# Altium PCB cw312ttmp91fw_template.PcbDoc
Units mil, origin at the board's own origin, x right, y up, seen from the top; angles counter-clockwise.
Board outline 2310.04 x 2113.83 mil, 2 copper layers (Top Layer, Bottom Layer); 17 components, 48 nets, 175 pads, 34 vias.
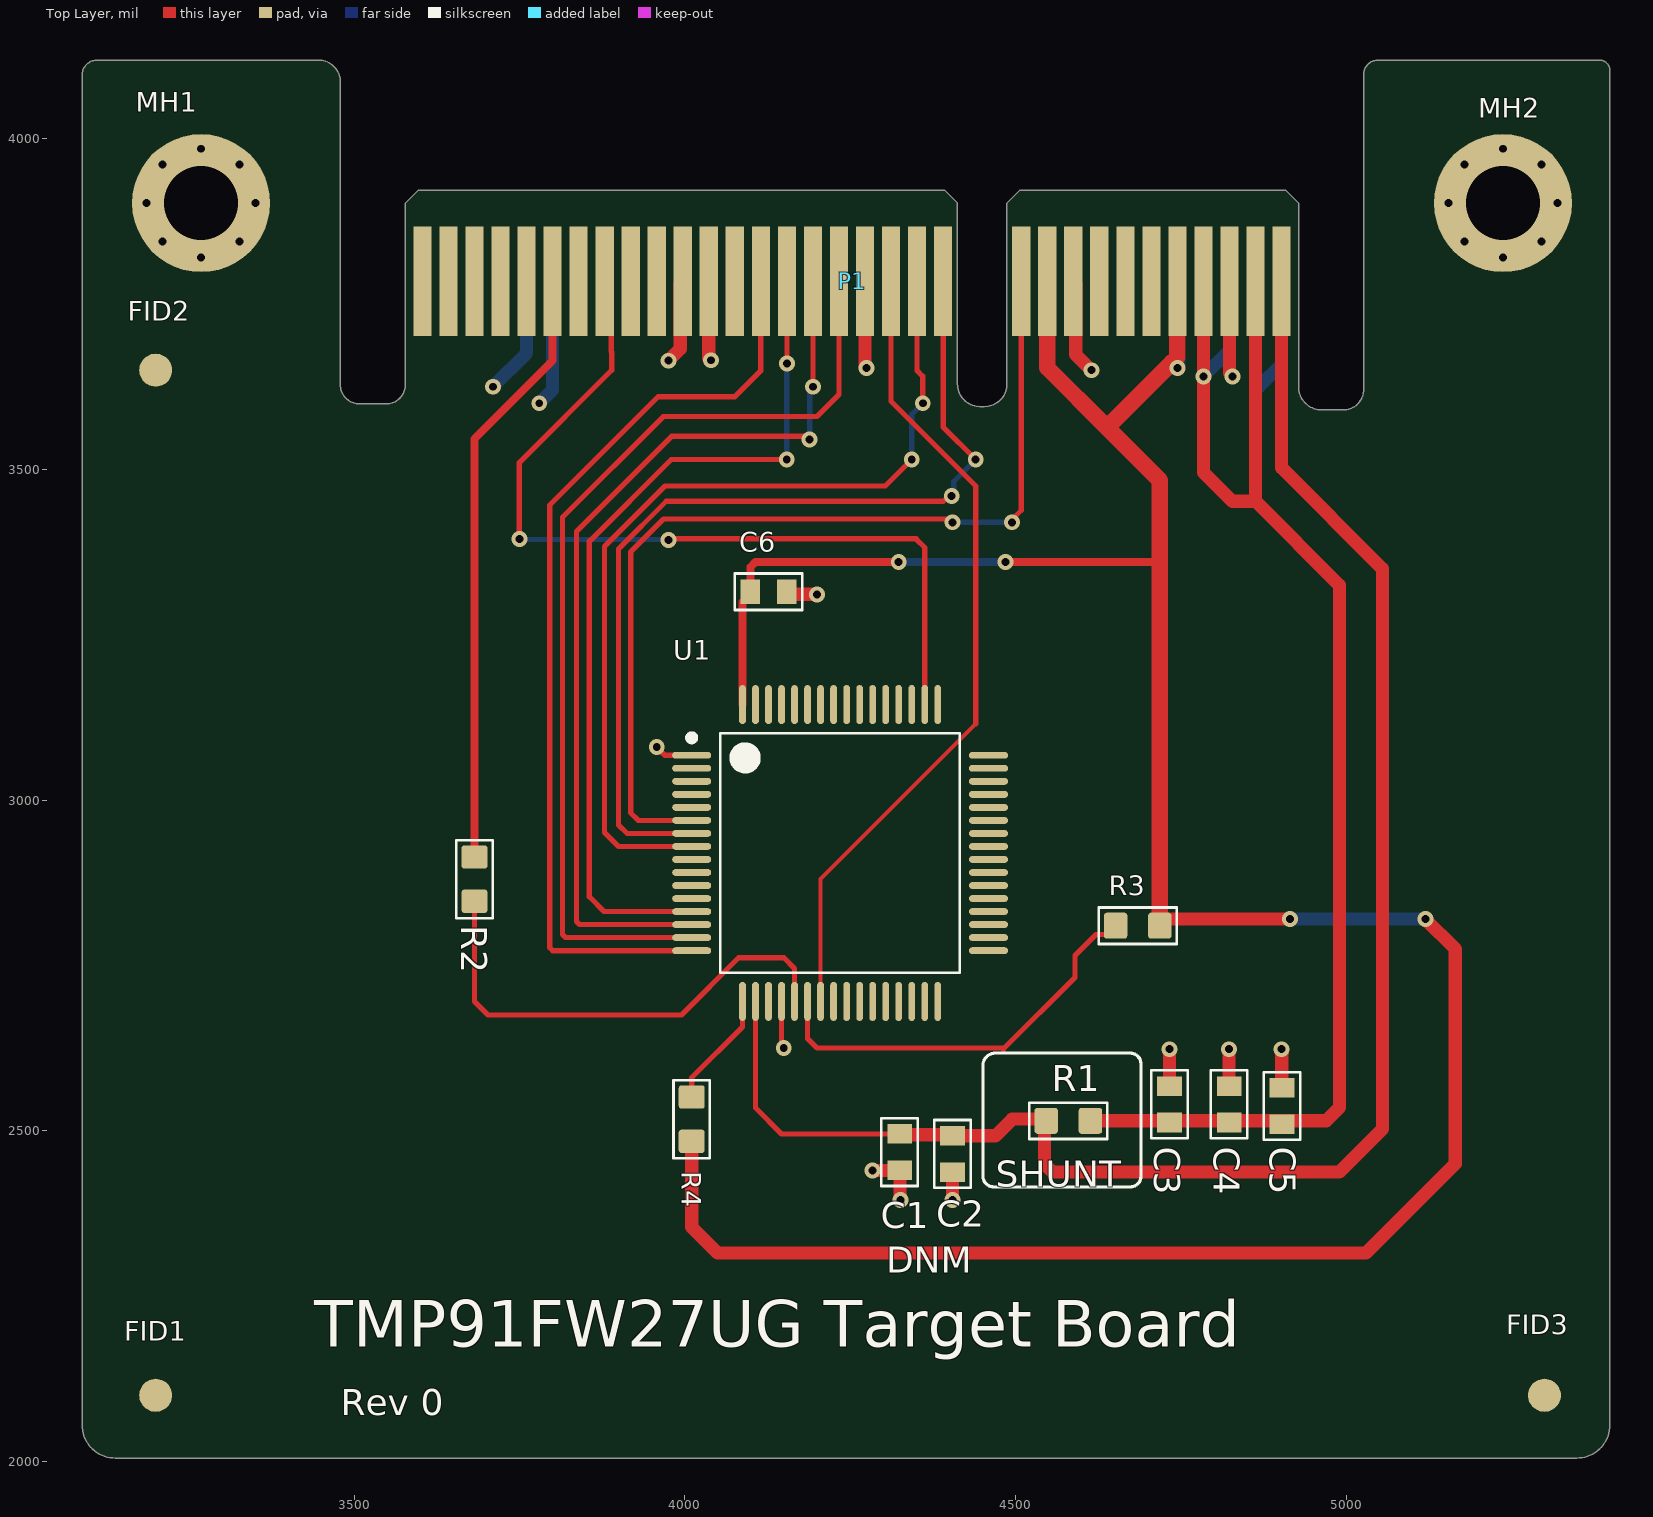
[diagram p0: Top Layer view]
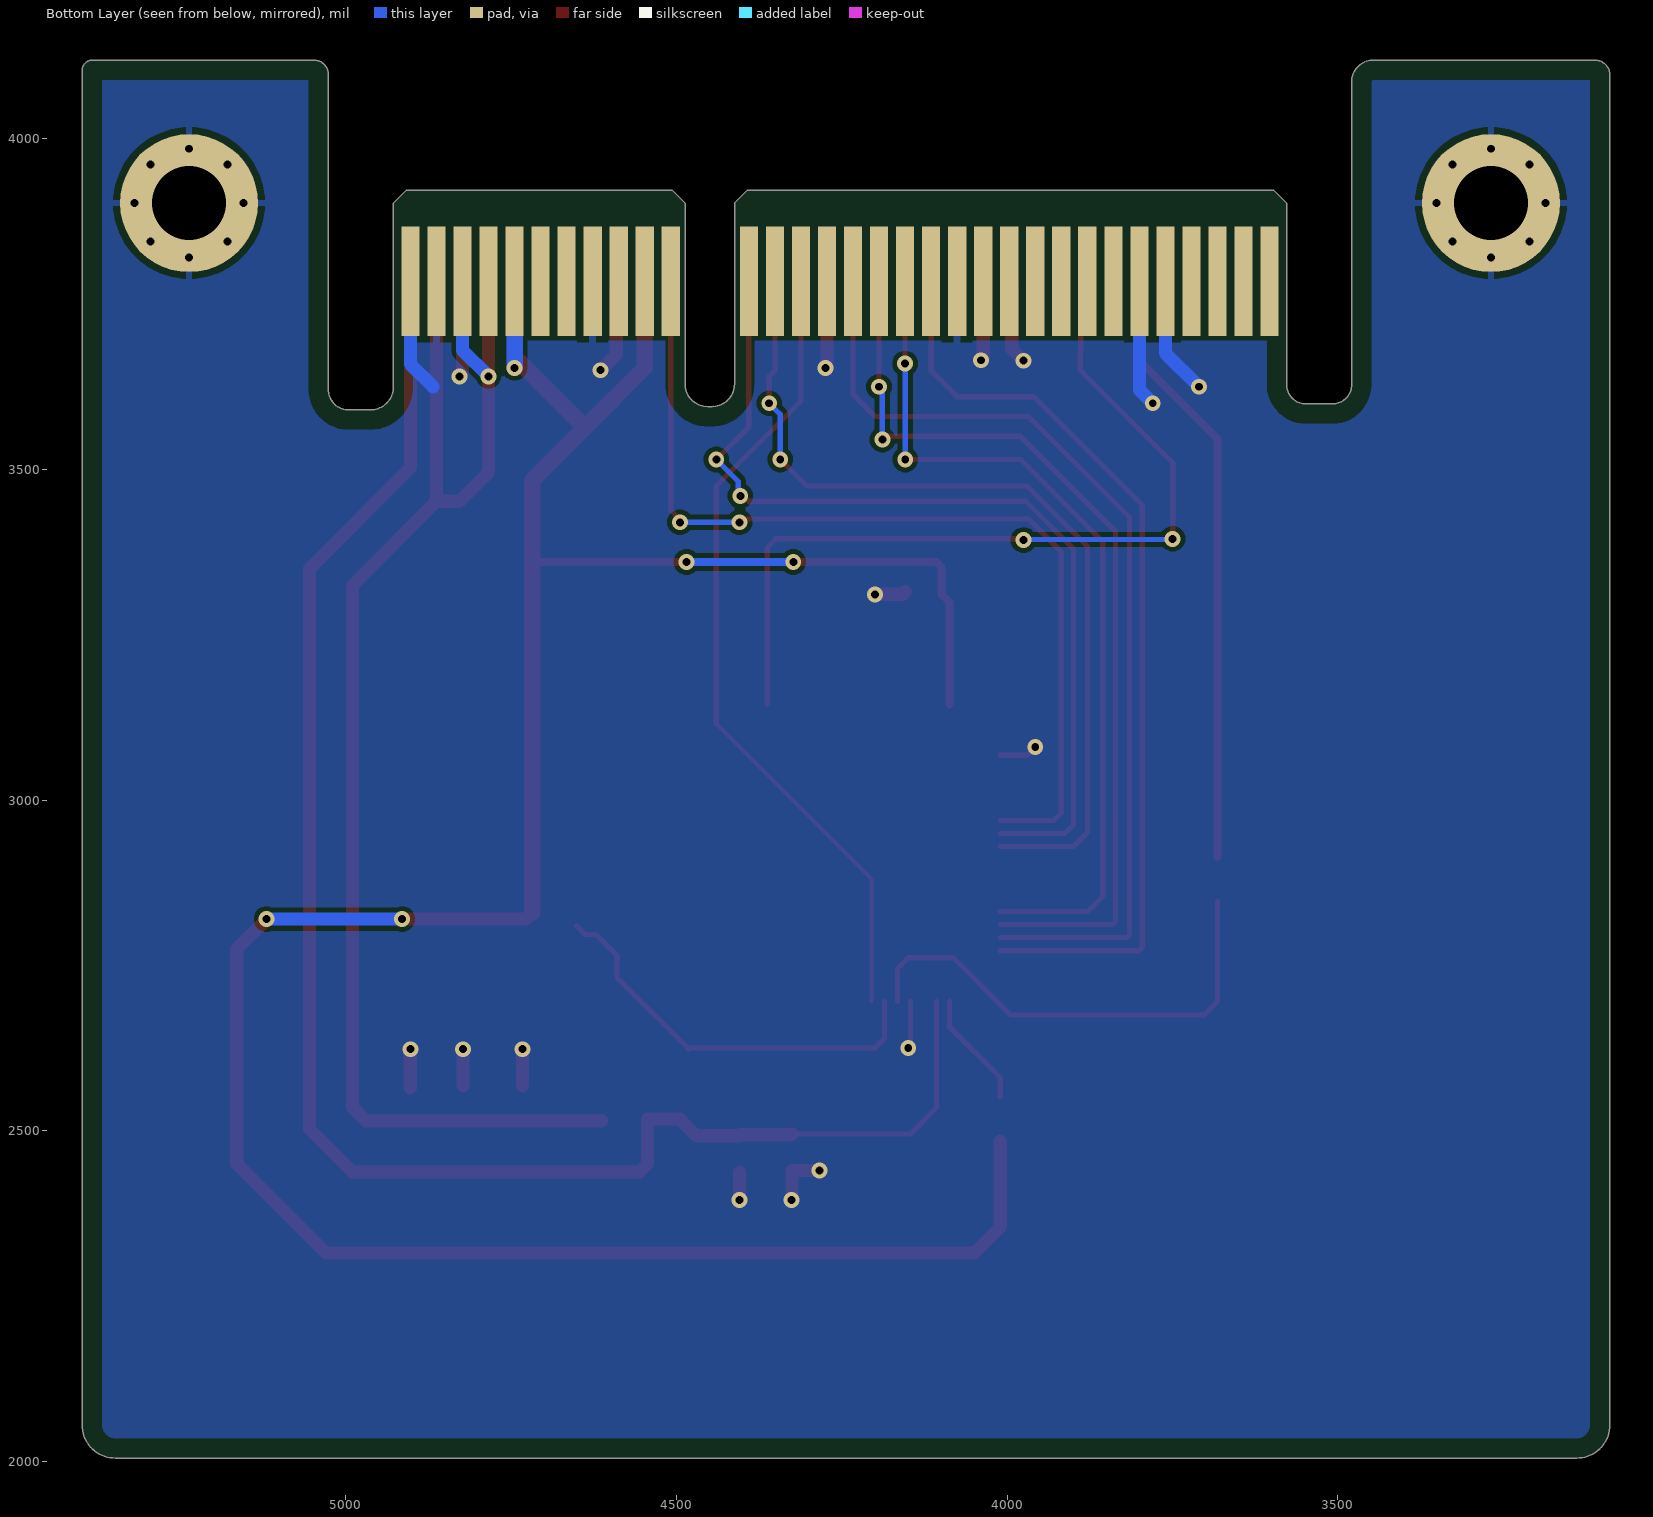
[diagram p1: Bottom Layer view, seen from below]
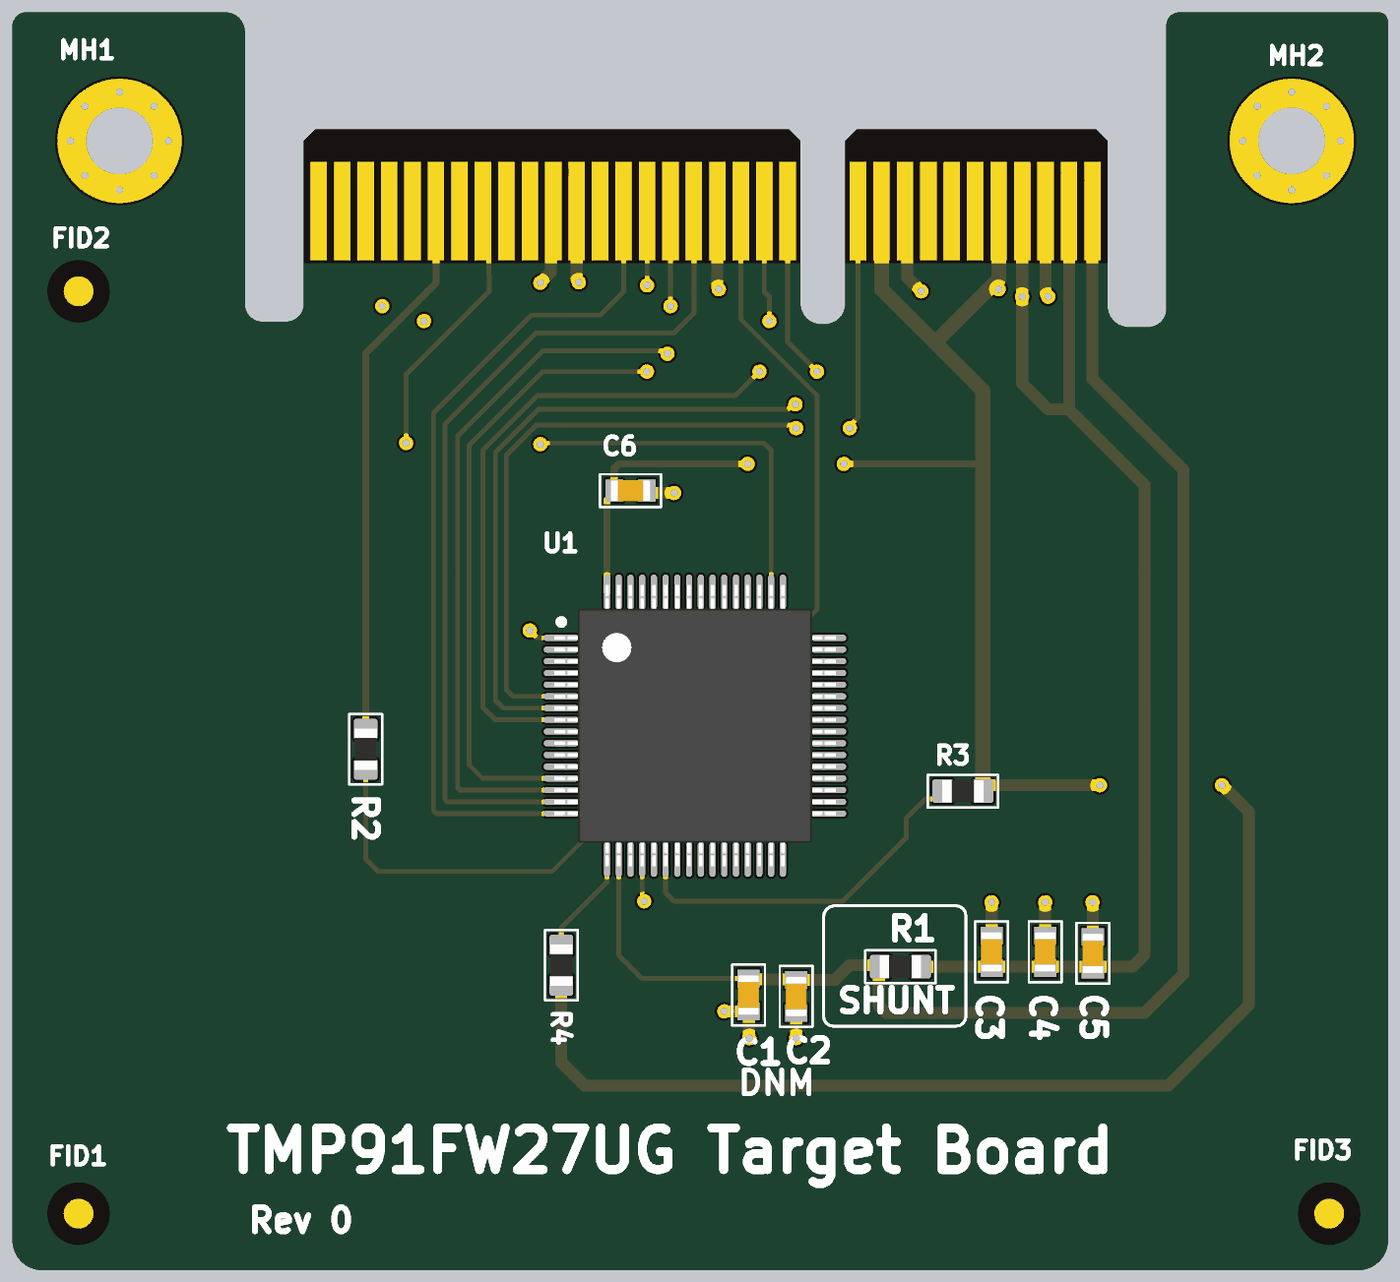
[diagram p2: 3D render of the assembled board from above, using the file's embedded part models]

## Layer stack, top to bottom
Top Solder: solder mask 0.4, Solder Resist, Dk 3.5
Top Layer: signal copper 1.4
Dielectric 1: dielectric 12.6, FR-4, Dk 4.8
Bottom Layer: signal copper 1.4
Bottom Solder: solder mask 0.4, Solder Resist, Dk 3.5

## Board outline
3088.86,2055 ccw(c3138.86,2055) 3138.86,2005 5348.9,2005 ccw(c5348.9,2055) 5398.9,2055 5398.9,4103.09 ccw(c5383.15,4103.09) 5383.15,4118.83 5048.5,4118.83 ccw(c5048.5,4096.91) 5026.58,4096.91 5026.58,3620.53 cw(c4996.05,3620.53) 4996.05,3590 4963.17,3590 cw(c4963.17,3625.02) 4928.15,3625.02 4928.15,3902.65 4908.46,3922.34 4506.89,3922.34 4487.2,3902.65 4487.2,3629.03 cw(c4453.17,3629.03) 4453.17,3595 4446.43,3595 cw(c4446.43,3629.03) 4412.4,3629.03 4412.4,3902.65 4392.72,3922.34 3597.44,3922.34 3577.76,3902.65 3577.76,3628.4 cw(c3548.35,3628.4) 3548.35,3599 3508.41,3599 cw(c3508.41,3628.08) 3479.33,3628.08 3479.33,4085.65 ccw(c3446.14,4085.65) 3446.14,4118.83 3111.5,4118.83 ccw(c3111.5,4096.2) 3088.86,4096.2

## Design rules (kind name [scope] priority, off if disabled: settings)
BoardOutlineClearance Silk_to_Outline [(OnLayer('Top Overlay'))] p1: gap=0 ignorepadtopadclearanceinfootprint=FALSE
BoardOutlineClearance [All] p2: gap=30 ignorepadtopadclearanceinfootprint=FALSE except(5: Track-OutlineEdge Track-CavityEdge Track-CutoutEdge Track-SplitBarrior Track-SplitContinuation SMDPad-OutlineEdge SMDPad-CavityEdge SMDPad-CutoutEdge SMDPad-SplitBarrior SMDPad-SplitContinuation)
Clearance [All] p1: gap=7 ignorepadtopadclearanceinfootprint=FALSE
HoleSize [All] p1: absolutevalues=TRUE maxlimit=200 minlimit=1 maxpercent=80.000 minpercent=20.000
MinimumSolderMaskSliver [All] p1: minsoldermaskwidth=5
PlaneConnect PlaneConnect_viaDirect [IsVia] p1: planeconnectstyle=Direct reliefexpansion=20 reliefentries=4 reliefconductorwidth=10 reliefairgap=10
PlaneConnect [All] p2: planeconnectstyle=Relief reliefexpansion=20 reliefentries=4 reliefconductorwidth=10 reliefairgap=10
PolygonConnect PolygonConnect_viaDirect [All vs isVia] p1: connectstyle=Direct reliefconductorwidth=10 reliefentries=4 polygonreliefangle="90 Angle" airgapwidth=10
PolygonConnect [All] p2: connectstyle=Relief reliefconductorwidth=10 reliefentries=4 polygonreliefangle="90 Angle" airgapwidth=10
RoutingVias [All] p1: holewidth=12 width=24 viastyle="Through Hole" minholewidth=12 minwidth=24 maxholewidth=100 maxwidth=200
SilkToSilkClearance [All] p1: silktosilkclearance=5
SilkToSolderMaskClearance [IsPad] p1: minsilkscreentomaskgap=5 clearancetoexposedcopper=TRUE
SolderMaskExpansion [All] p1: expansion=4 istentingtop=FALSE
Width [All] p1: maxlimit=100 minlimit=6 preferedwidth=8 minimp=50.000000 maximp=50.000000 favimp=50.000000
25 further rules are at their usual default settings.

## Classes and differential pairs
component class cw312ttmp91fw_cardedge: MH1 MH2 P1
component class cw312ttmp91fw_microcontroller: C1 C2 C3 C4 C5 C6 C? FID1 FID2 FID3 R1 R2 R3 R4 R? U1

## Components (designator, comment, footprint, x,y, rotation, side; value= is the part's Value field where it differs from the comment)
C1 "DNM" CAPC0603_M 4325,2467.56 r270 top value=100n
C2 "DNM" CAPC0603_M 4405,2465 r270 top value=100n
C3 "100n" CAPC0603_M 4733.19,2540 r90 top
C4 "100n" CAPC0603_M 4823.19,2540 r90 top
C5 "2u2" CAPC0603_M 4903.19,2537.44 r90 top
C6 "100n" CAPC0603_M 4126.73,3315 r0 top
FID1 "FIDU-ROUND-1.0MM" FIDU-ROUND-1.0mm#1 3195,2100 r0 top
FID2 "FIDU-ROUND-1.0MM" FIDU-ROUND-1.0mm#2 3210.57,3663.35 r0 top
FID3 "FIDU-ROUND-1.0MM" FIDU-ROUND-1.0mm#3 5285,2110 r0 top
MH1 "4-40 MH, Tight Fit" MOUNT_#4_TIGHT 3268.7,3902.65 r0 top
MH2 "4-40 MH, Tight Fit" MOUNT_#4_TIGHT 5237.2,3902.65 r0 top
P1 "PCIeX4-GF-2D-1000-1K-O64" PCIeX4-GF-2D-1000-1K-O64 4528.54,3784.54 r180 top
R1 "10R" RESC1608X55N 4580,2515 r0 top
R2 "10R" RESC1608X55N 3682.09,2880.47 r270 top
R3 "1k" RESC1608X55N 4685,2810 r0 top
R4 "1k" RESC1608X55N 4010.59,2517.56 r270 top
U1 "TMP91FW27UG" TQFP50P1200X1200X120-64N 4235,2920 r0 top

## Footprints (in the part's own frame and the unit in brackets; to place one, negate y for a bottom-side part, rotate by r counter-clockwise, add the part's x,y. Pads: shape width x height; smd on the part's side, far side on the other; paste and mask are expansions set on the pad)
CAPC0603_M [mm]
  rect 0.75x0.95 smd: 1(-0.7,0) 2(0.7,0)
  silkscreen extent -1.3,-0.7 1.3,0.7, body extent -0.85,-0.45 0.85,0.45, height 0.9
FIDU-ROUND-1.0mm#1 [mil]
  round 50 smd paste-78.74 mask+27.56: M1(5,0)
FIDU-ROUND-1.0mm#2 [mil]
  round 50 smd paste-78.74 mask+27.56: M1(-10.57,-13.35)
FIDU-ROUND-1.0mm#3 [mil]
  round 50 smd paste-78.74 mask+27.56: M1(15,-10)
MOUNT_#4_TIGHT [mil]
  round 14 hole 12: 1(-82.21,0) 1(-58.13,-58.13) 1(-58.13,58.13) 1(0,-82.21) 1(0,82.21) 1(0,82.21) 1(58.13,-58.13) 1(58.13,58.13) 1(82.21,0)
  round 208.66 hole 112.2: 1(0,0)
PCIeX4-GF-2D-1000-1K-O64 [mm] "Golden finger, PCIeX4, Dual, Opposite, Pitch 1mm, 64-Position"
  rect 0.7x4.2 smd far side paste-1: A1(-9.5,0) A2(-8.5,0) A3(-7.5,0) A4(-6.5,0) A5(-5.5,0) A6(-4.5,0) A7(-3.5,0) A8(-2.5,0) A9(-1.5,0) A10(-0.5,0) A11(0.5,0) A12(3.5,0) A13(4.5,0) A14(5.5,0) A15(6.5,0) A16(7.5,0) A17(8.5,0) A18(9.5,0) A19(10.5,0) A20(11.5,0) A21(12.5,0) A22(13.5,0) A23(14.5,0) A24(15.5,0) A25(16.5,0) A26(17.5,0) A27(18.5,0) A28(19.5,0) A29(20.5,0) A30(21.5,0) A31(22.5,0) A32(23.5,0)
  rect 0.7x4.2 smd paste-1: B1(-9.5,0) B2(-8.5,0) B3(-7.5,0) B4(-6.5,0) B5(-5.5,0) B6(-4.5,0) B7(-3.5,0) B8(-2.5,0) B9(-1.5,0) B10(-0.5,0) B11(0.5,0) B12(3.5,0) B13(4.5,0) B14(5.5,0) B15(6.5,0) B16(7.5,0) B17(8.5,0) B18(9.5,0) B19(10.5,0) B20(11.5,0) B21(12.5,0) B22(13.5,0) B23(14.5,0) B24(15.5,0) B25(16.5,0) B26(17.5,0) B27(18.5,0) B28(19.5,0) B29(20.5,0) B30(21.5,0) B31(22.5,0) B32(23.5,0)
RESC1608X55N [mm] "Chip Resistor, Body 1.6x0.8mm, EIA 0603, IPC Medium Density"
  round 0.254 on Mech15: 0(0,0)
  rrect25% 0.9x1 smd: 1(-0.85,0) 2(0.85,0)
  Top Layer pour cut-out: -0.6,0.5 0.6,0.5 0.6,-0.5 -0.6,-0.5
  silkscreen extent -1.5,-0.7 1.5,0.7, body extent -0.87,-0.47 0.88,0.48, height 0.54
TQFP50P1200X1200X120-64N [mm] "TQFP, 64-Leads, Body 10.00x10.00mm, Pitch 0.50mm, IPC Medium Density"
  oval 1.5x0.26 smd: 1(-5.7,3.75) 2(-5.7,3.25) 3(-5.7,2.75) 4(-5.7,2.25) 5(-5.7,1.75) 6(-5.7,1.25) 7(-5.7,0.75) 8(-5.7,0.25) 9(-5.7,-0.25) 10(-5.7,-0.75) 11(-5.7,-1.25) 12(-5.7,-1.75) 13(-5.7,-2.25) 14(-5.7,-2.75) 15(-5.7,-3.25) 16(-5.7,-3.75) 33(5.7,-3.75) 34(5.7,-3.25) 35(5.7,-2.75) 36(5.7,-2.25) 37(5.7,-1.75) 38(5.7,-1.25) 39(5.7,-0.75) 40(5.7,-0.25) 41(5.7,0.25) 42(5.7,0.75) 43(5.7,1.25) 44(5.7,1.75) 45(5.7,2.25) 46(5.7,2.75) 47(5.7,3.25) 48(5.7,3.75)
  oval 0.26x1.5 smd: 17(-3.75,-5.7) 18(-3.25,-5.7) 19(-2.75,-5.7) 20(-2.25,-5.7) 21(-1.75,-5.7) 22(-1.25,-5.7) 23(-0.75,-5.7) 24(-0.25,-5.7) 25(0.25,-5.7) 26(0.75,-5.7) 27(1.25,-5.7) 28(1.75,-5.7) 29(2.25,-5.7) 30(2.75,-5.7) 31(3.25,-5.7) 32(3.75,-5.7) 49(3.75,5.7) 50(3.25,5.7) 51(2.75,5.7) 52(2.25,5.7) 53(1.75,5.7) 54(1.25,5.7) 55(0.75,5.7) 56(0.25,5.7) 57(-0.25,5.7) 58(-0.75,5.7) 59(-1.25,5.7) 60(-1.75,5.7) 61(-2.25,5.7) 62(-2.75,5.7) 63(-3.25,5.7) 64(-3.75,5.7)
  silkscreen extent -5.82,-4.6 4.6,4.6, body extent -6,-6 6,6, height 1.2

## Part data
C1 C2: library part CCHIP-100n-0603, Case-EIA=0603, Case-Metric=1608, Manufacture 1=Kemet, Manufacture Part Number 1=C0603C104K5RACTU, Rated Voltage=50VDC, Supplier Part Number 1=399-5089-2-ND, Component Group=Capacitor, Component Type=Standard, Mounting Technology=SMT, Part Number=CCHIP-100n-0603, Pin Count=2, Supplier 1=Digi-Key
C3 C4 C6: library part CCHIP-100n-0603, "100n, 0603", Case-EIA=0603, Case-Metric=1608, Manufacture 1=Kemet, Manufacture Part Number 1=C0603C104K5RACTU, Rated Voltage=50VDC, Supplier Part Number 1=399-5089-2-ND, Component Group=Capacitor, Component Type=Standard, Mounting Technology=SMT, Part Number=CCHIP-100n-0603, Pin Count=2, Supplier 1=Digi-Key
C5: library part CCHIP-2u2-0603, "2u2, 0603", Case-EIA=0603, Case-Metric=1608, Manufacture 1=Samsung, Manufacture Part Number 1=CL10B225KP8NNNC, Rated Voltage=10VDC, Supplier Part Number 1=1276-1134-2-ND, Component Group=Capacitor, Component Type=Standard, Mounting Technology=SMT, Part Number=CCHIP-2u2-0603, Pin Count=2, Supplier 1=Digi-Key
FID1 FID2 FID3: "ROUND FIDUCIAL", Component Group="PCB Feature", Component Type="Standard (No BOM)", Part Number=FIDU-ROUND-1.0MM, Pin Count=0
MH1 MH2: library part MOUNT_#4_TIGHT, "Machine screw 4-40 Mounting Hole", Component Group=Mechanical, Component Type=Mechanical, Part Number=MOUNT_#4_TIGHT, Pin Count=1, PP Material Stack=0, PP Rotation=0
P1: library part CMP-0001-00031-2, "Golden finger, PCIeX4, Dual, Opposite, Pitch 1mm, 64-Position", ClassName="Edge Connector", Datasheet Version="rev2.0, Apr-2007", Mating Connector=Molex-87715-9106, Package Reference=PCIeX4-GF-2D-1000-1K-O64, Publisher=Altium
R1 R2: library part RCHIP-10R-0603, "10R res, 0603, 1%, 1/10W", Case-EIA=0603, Case-Metric=1608, Manufacture 1=Yageo, Manufacture Part Number 1=RC0603FR-0710RL, Rated Power=0.1W, Rated Voltage=75VDC, Supplier Part Number 1=311-10.0HRCT-ND, Temperature Range="-55C to 155C", Tolerance=1%, Component Group=Resistor, Component Type=Standard, Mounting Technology=SMT, Part Number=RCHIP-10R-0603, Pin Count=2, Supplier 1=Digi-Key
R3 R4: library part RCHIP-1K-0603, "1k res, 0603, 1%, 1/10W", Case-EIA=0603, Case-Metric=1608, Manufacture 1=Yageo, Manufacture Part Number 1=RC0603FR-071KL, Rated Power=0.1W, Rated Voltage=75VDC, Supplier Part Number 1=311-1.00KHRCT-ND, Temperature Range="-55C to 155C", Tolerance=1%, Component Group=Resistor, Component Type=Standard, Mounting Technology=SMT, Part Number=RCHIP-1K-0603, Pin Count=2, Supplier 1=Digi-Key
U1: "TMP91FW27, 16-bit micro, LQFP64_0.5", Manufacture 1=Toshiba, Component Group="Digital IC", Component Type=Standard, Manufacture Part Number 1=TMP91FW27UG, Part Number=TMP91FW27UG, Pin Count=64, PP Material Stack=0, PP Rotation=0, PP Rotation1=0

## Via types
v1: diameter 24, hole 12, Top Layer to Bottom Layer, 34 vias

## Nets (pads, with @x,y where several pads share a name; then routed paths per layer and width w, separated by ;. In a path a pad name is that pad's centre, name@x,y a point inside that pad or via, vN(x,y) a via of type N, cw(c..) or ccw(c..) an arc to the next point about the centre after c; other vN are vias at no path point)
BOOT_MODE: P1.B25 U1.50 | length 1309.2
  Top Layer w8: v1(3750,3395) 3750,3510.54 3889.46,3650 3889.46,3677.56 3888.72,3678.3 3888.72,3774.76 P1.B25 ; v1(3975.4,3393.1) 3977.3,3395 4350,3395 4362.95,3382.05 U1.50
  Bottom Layer w8: v1(3750,3395) 3750.95,3394.05 3974.45,3394.05 v1(3975.4,3393.1)
CLK_FROM_SAM: P1.A29
CLKIN: P1.B27 R2.1 | length 919.5
  Top Layer w12: R2.1 3682.09,3546.26 3800.2,3664.37 P1.B27
CS: P1.B26
FILT_HP: C3.1 C4.1 C5.1 P1.A3 P1.B2 P1.B4 R1.2 | length 2232.8
  Top Layer w20: R1.2 4970,2515 4990,2535 4990,3325 4863.19,3451.81 ; P1.B4 v1(4784.45,3640.75) 4784.45,3495.55 4828.19,3451.81 4863.19,3451.81 ; P1.B2 4863.19,3451.81
  Bottom Layer w20: v1(4784.45,3640.75) 4823.82,3680.12 P1.A3
FILTIN: C6.1 P1.A5 P1.B5 P1.B10 R3.2 R4.2 U1.64 | length 4399.7
  Top Layer w12: U1.64 4087.36,3299.25 4099.17,3311.06 C6.1 4099.17,3352.13 4107.05,3360 v1(4323.58,3360) ; v1(4485,3360) 4708.46,3360 4718.46,3350
  Top Layer w20: R4.2 4010.59,2354.41 4050,2315 5030,2315 5165,2450 5165,2775 v1(5120,2820) ; 4718.46,2829.69 4728.15,2820 v1(4915,2820)
  Top Layer w25: P1.B10 4548.23,3653.59 4638.35,3563.46 ; 4718.46,2829.69 4718.46,3350 4718.46,3483.35 4638.35,3563.46 ; v1@4736.74,3661.85 4638.35,3563.46 ; 4745.08,3670.19 P1.B5
  Bottom Layer w12: v1(4323.58,3360) v1(4485,3360)
  Bottom Layer w20: v1(4915,2820) v1(5120,2820)
  Bottom Layer w25: v1(4745,3653.59) 4745.08,3653.67 P1.A5
GND: C1.2 C2.2 C3.2 C4.2 C5.2 C6.2 MH1.1 MH2.1 P1.A1 P1.A2 P1.A8 P1.A20 P1.A27 P1.A28 P1.B3 P1.B9 P1.B15 P1.B21 P1.B22 U1.1 U1.20 | length 1697.1
  Top Layer w8: v1(3957.68,3080) 3970.04,3067.64 U1.1 ; U1.20 4146.42,2628.31 v1(4149.73,2625)
  Top Layer w20: v1(3975.4,3664.37) 3993.27,3682.24 3993.27,3780.76 P1.B22 ; P1.B21 4036.42,3668.58 v1(4040,3665) ; C6.2 4158.23,3311.06 v1(4200,3311.06) ; P1.B15 4272.64,3655.95 v1(4275,3653.59) ; v1(4284.21,2440) C1.2 4325.64,2439.36 4325.64,2395.64 v1(4326.28,2395) ; v1(4405,2395) C2.2 ; P1.B9 4591.38,3780.76 4591.38,3673.62 v1(4615,3650) ; C3.2 v1(4733.19,2623.31) ; C4.2 v1(4823.19,2623.31) ; P1.B3 4823.82,3646.2 4828.19,3641.83 v1(4828.19,3640.75) ; v1(4902.56,2623.31) 4902.87,2623 4902.87,2565.31 C5.2
  Bottom Layer w20: v1(3710,3625) 3760.83,3675.83 P1.A28 ; v1(3780,3600) 3800.2,3620.2 P1.A27 ; 4868.19,3625 4902.56,3659.37 P1.A1
GPIO1_TX: P1.B16 U1.15 | length 1494.2
  Top Layer w8: U1.15 3820.03,2792.05 3815.34,2796.73 3815.34,3427.66 3967.68,3580 4200,3580 4233.27,3613.27 P1.B16
GPIO2_RX: P1.B17 U1.14 | length 1429.1
  Top Layer w8: U1.14 3840.93,2811.73 3836.25,2816.42 3836.25,3406.25 3980,3550 4183.9,3550 v1(4188.9,3545) v1@4193.9,3540 ; v1(4193.9,3625) P1.B17
  Bottom Layer w8: v1(4188.9,3545) 4188.9,3620 v1(4193.9,3625)
GPIO3: P1.B18 U1.13 | length 1320.7
  Top Layer w8: U1.13 3878.24,2831.42 3855.85,2853.81 3855.85,3391.14 3979.7,3515 v1(4154.29,3515) ; v1(4154.53,3660) P1.B18
  Bottom Layer w6: v1@4154.29,3659.76 v1(4154.53,3660)
  Bottom Layer w8: v1(4154.29,3515) v1@4154.29,3659.76
GPIO4: P1.B19 U1.16 | length 1424.4
  Top Layer w8: U1.16 3800.43,2772.36 3795.74,2777.05 3795.74,3445.74 3960,3610 4075.79,3610 4115.16,3649.37 P1.B19
HDR1: P1.A9
HDR2: P1.A10
HDR3: P1.A11
HDR4: P1.A12
HDR5: P1.A13
HDR6: P1.A14
HDR7: P1.A15
HDR8: P1.A16
HDR9: P1.A17
HDR10: P1.A18
JTAG_TCK: P1.B32
JTAG_TDI: P1.B29
JTAG_TDO: P1.B30
JTAG_TMS: P1.B31
LED1: P1.B11 U1.6 | length 1461.1
  Top Layer w8: U1.6 3929.95,2969.21 3918.31,2980.86 3918.31,3375.21 3968.1,3425 4400,3425 v1(4405,3420) ; v1(4495,3420) 4495,3424.33 4508.86,3438.19 P1.B11
  Bottom Layer w8: v1(4405,3420) v1(4495,3420)
LED2: P1.B12 U1.7 | length 1430.1
  Top Layer w8: U1.7 3913.07,2949.53 3900,2962.59 3900,3379.77 3972.05,3451.81 4391.2,3451.81 4399.39,3460 v1(4403.72,3460) ; P1.B12 4390.75,3564.25 v1(4440,3515)
  Bottom Layer w8: v1(4403.72,3460) 4406.78,3463.06 4406.78,3481.78 v1(4440,3515)
LED3: P1.B13 U1.8 | length 1372
  Top Layer w8: U1.8 3900,2929.84 3878.71,2951.13 3878.71,3383.3 3970.41,3475 4303.27,3475 v1(4343.27,3515) ; P1.B13 4351.38,3649.37 4360,3640.75 v1(4360,3600)
  Bottom Layer w8: v1(4343.27,3515) 4343.27,3583.27 v1(4360,3600)
MISO: P1.B23
MOSI: P1.B24
NetR2_2: R2.2 U1.21 | length 736.4
  Top Layer w8: R2.2 3682.09,2695.59 3702.68,2675 3995,2675 4081.69,2761.69 4149.73,2761.69 4166.1,2745.32 U1.21
NetR3_1: R3.1 U1.22 | length 625.6
  Top Layer w8: U1.22 4185.79,2639.21 4200,2625 4480,2625 4481.69,2623.31 4590,2731.63 4590,2765 4621.82,2796.82 4638.35,2796.82 R3.1
NetR4_1: R4.1 U1.17 | length 176.4
  Top Layer w8: R4.1 4010.59,2580.34 4087.36,2657.11 U1.17
nRST: P1.B14 U1.23 | length 1239.1
  Top Layer w6: U1.23 4205.47,2880.47 4440,3115
  Top Layer w8: P1.B14 4312.01,3602.99 4440,3475 4440,3115
nRST_OUT: P1.A19
SCK: P1.B20
SHUNTL: C1.1 C2.1 P1.B1 R1.1 U1.18 | length 2581.6
  Top Layer w8: U1.18 4107.05,2534.68 4146.61,2495.12 C1.1
  Top Layer w20: C1.1 4326.28,2493.84 4403.72,2493.84 C2.1 4470,2492.56 4495,2517.56 4543.98,2517.56 4543.98,2450 4556.54,2437.44 4990,2437.44 5055,2502.44 5055,3350 4902.56,3502.44 P1.B1
TRACECLK: P1.A21
TRACED0: P1.A22
TRACED1: P1.A23
TRACED2: P1.A24
TRACED3: P1.A25
VCC1.0: P1.B6
VCC1.2: P1.B7
VCC1.8: P1.B8
VCC2.5: P1.A4
VCC5.0: P1.A6
VCCADJ: P1.A7
pads on no net: FID1.M1 FID2.M1 FID3.M1 P1.A26 P1.A30 P1.A31 P1.A32 P1.B28 R1.0 R2.0 R3.0 R4.0 U1.2 U1.3 U1.4 U1.5 U1.9 U1.10 U1.11 U1.12 U1.19 U1.24 U1.25 U1.26 U1.27 U1.28 U1.29 U1.30 U1.31 U1.32 U1.33 U1.34 U1.35 U1.36 U1.37 U1.38 U1.39 U1.40 U1.41 U1.42 U1.43 U1.44 U1.45 U1.46 U1.47 U1.48 U1.49 U1.51 U1.52 U1.53 U1.54 U1.55 U1.56 U1.57 U1.58 U1.59 U1.60 U1.61 U1.62 U1.63

## Polygon pours and split planes (outlines as drawn)
GND on Bottom Layer "GND_L02_P000" (solid, pour order 0): 3210.57,4260 3220.57,4250 3535,4250 3535,3795 3530,3790 3535.46,3784.54 4975,3784.54 4975,4380 4980,4385 5055,4310 5450,4310 5450,1915 5235,1700 2890,1700 2890,4070 3020,4200

## Silkscreen, mask and mechanical layers (free items; w line width, h text height)
Top Overlay:
  lines w5: 4450.94,2431.61 ccw(c4467.56,2431.61) 4467.56,2415 4673.39,2415 ccw(c4673.39,2431.61) 4690,2431.61 4690,2577.18 4690,2600.83 ccw(c4673.39,2600.83) 4673.39,2617.44 4469.76,2617.44 ccw(c4469.76,2598.62) 4450.94,2598.62 4450.94,2560 4450.94,2431.61
  text "SHUNT" at 4470,2415 h40
  text "DNM" at 4305,2285 h40
  text "TMP91FW27UG Target Board" at 3440,2173.33 h70
  text "Rev 0" at 3480,2070 h40
Mechanical 1:
  lines w3.94: 3088.86,4054.54 3088.86,4096.2 cw(c3111.5,4096.2) 3111.5,4118.83 3446.14,4118.83 cw(c3446.14,4085.65) 3479.33,4085.65 3479.33,3696.1 3479.33,3628.08 ; 3577.76,3628.4 3577.76,3696.1 3577.76,3902.65 3597.44,3922.34 4392.72,3922.34 4412.4,3902.65 4412.4,3629.03 ; 4487.2,3629.03 4487.2,3902.65 4506.89,3922.34 4908.46,3922.34 4928.15,3902.65 4928.15,3697.44 4928.15,3625.02 ; 5026.58,3620.53 5026.58,4096.91 cw(c5048.5,4096.91) 5048.5,4118.83 5383.15,4118.83 cw(c5383.15,4103.09) 5398.9,4103.09
  lines w3.97: 3088.86,4054.54 3088.86,2055 ccw(c3138.86,2055) 3138.86,2005 5348.9,2005 ccw(c5348.9,2055) 5398.9,2055 5398.9,4103.09 ; 3479.33,3628.08 ccw(c3508.41,3628.08) 3508.41,3599 3548.35,3599 ccw(c3548.35,3628.4) 3577.76,3628.4 ; 4412.4,3629.03 ccw(c4446.43,3629.03) 4446.43,3595 4453.17,3595 ccw(c4453.17,3629.03) 4487.2,3629.03 ; 4928.15,3625.02 ccw(c4963.17,3625.02) 4963.17,3590 4996.05,3590 ccw(c4996.05,3620.53) 5026.58,3620.53